# Altium PCB IR2104S.PcbDoc
Units mil, origin at the board's own origin, x right, y up, seen from the top; angles counter-clockwise.
Board outline 1968.5 x 1968.5 mil, 4 copper layers (Top Layer, Layer 1, Layer 2, Bottom Layer), stack 23.756 mil thick; 40 components, 27 nets, 118 pads, 106 vias.
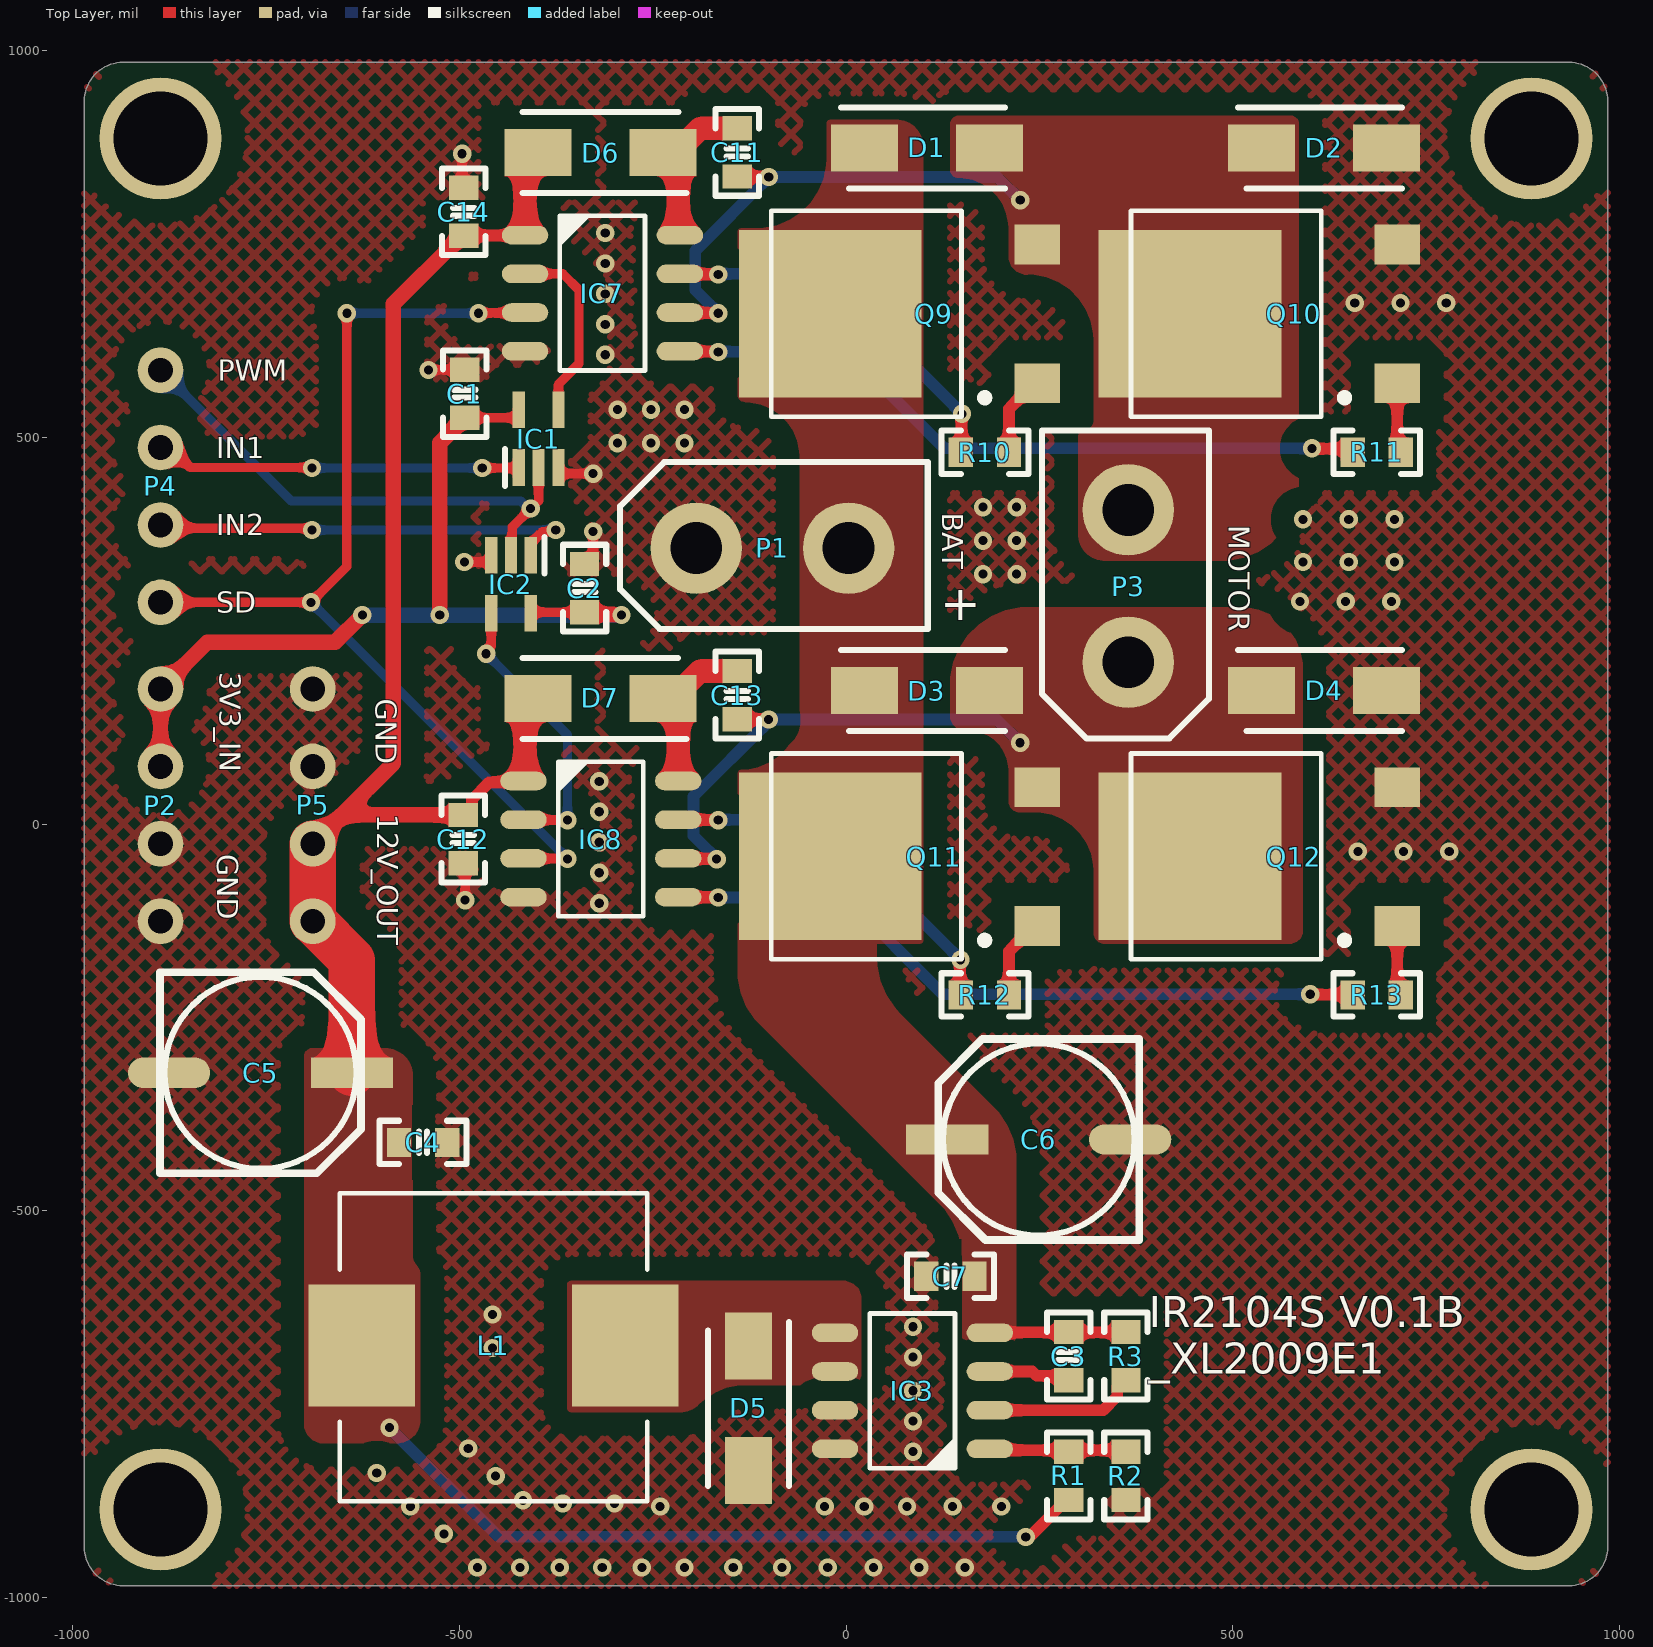
[diagram p0: Top Layer view]
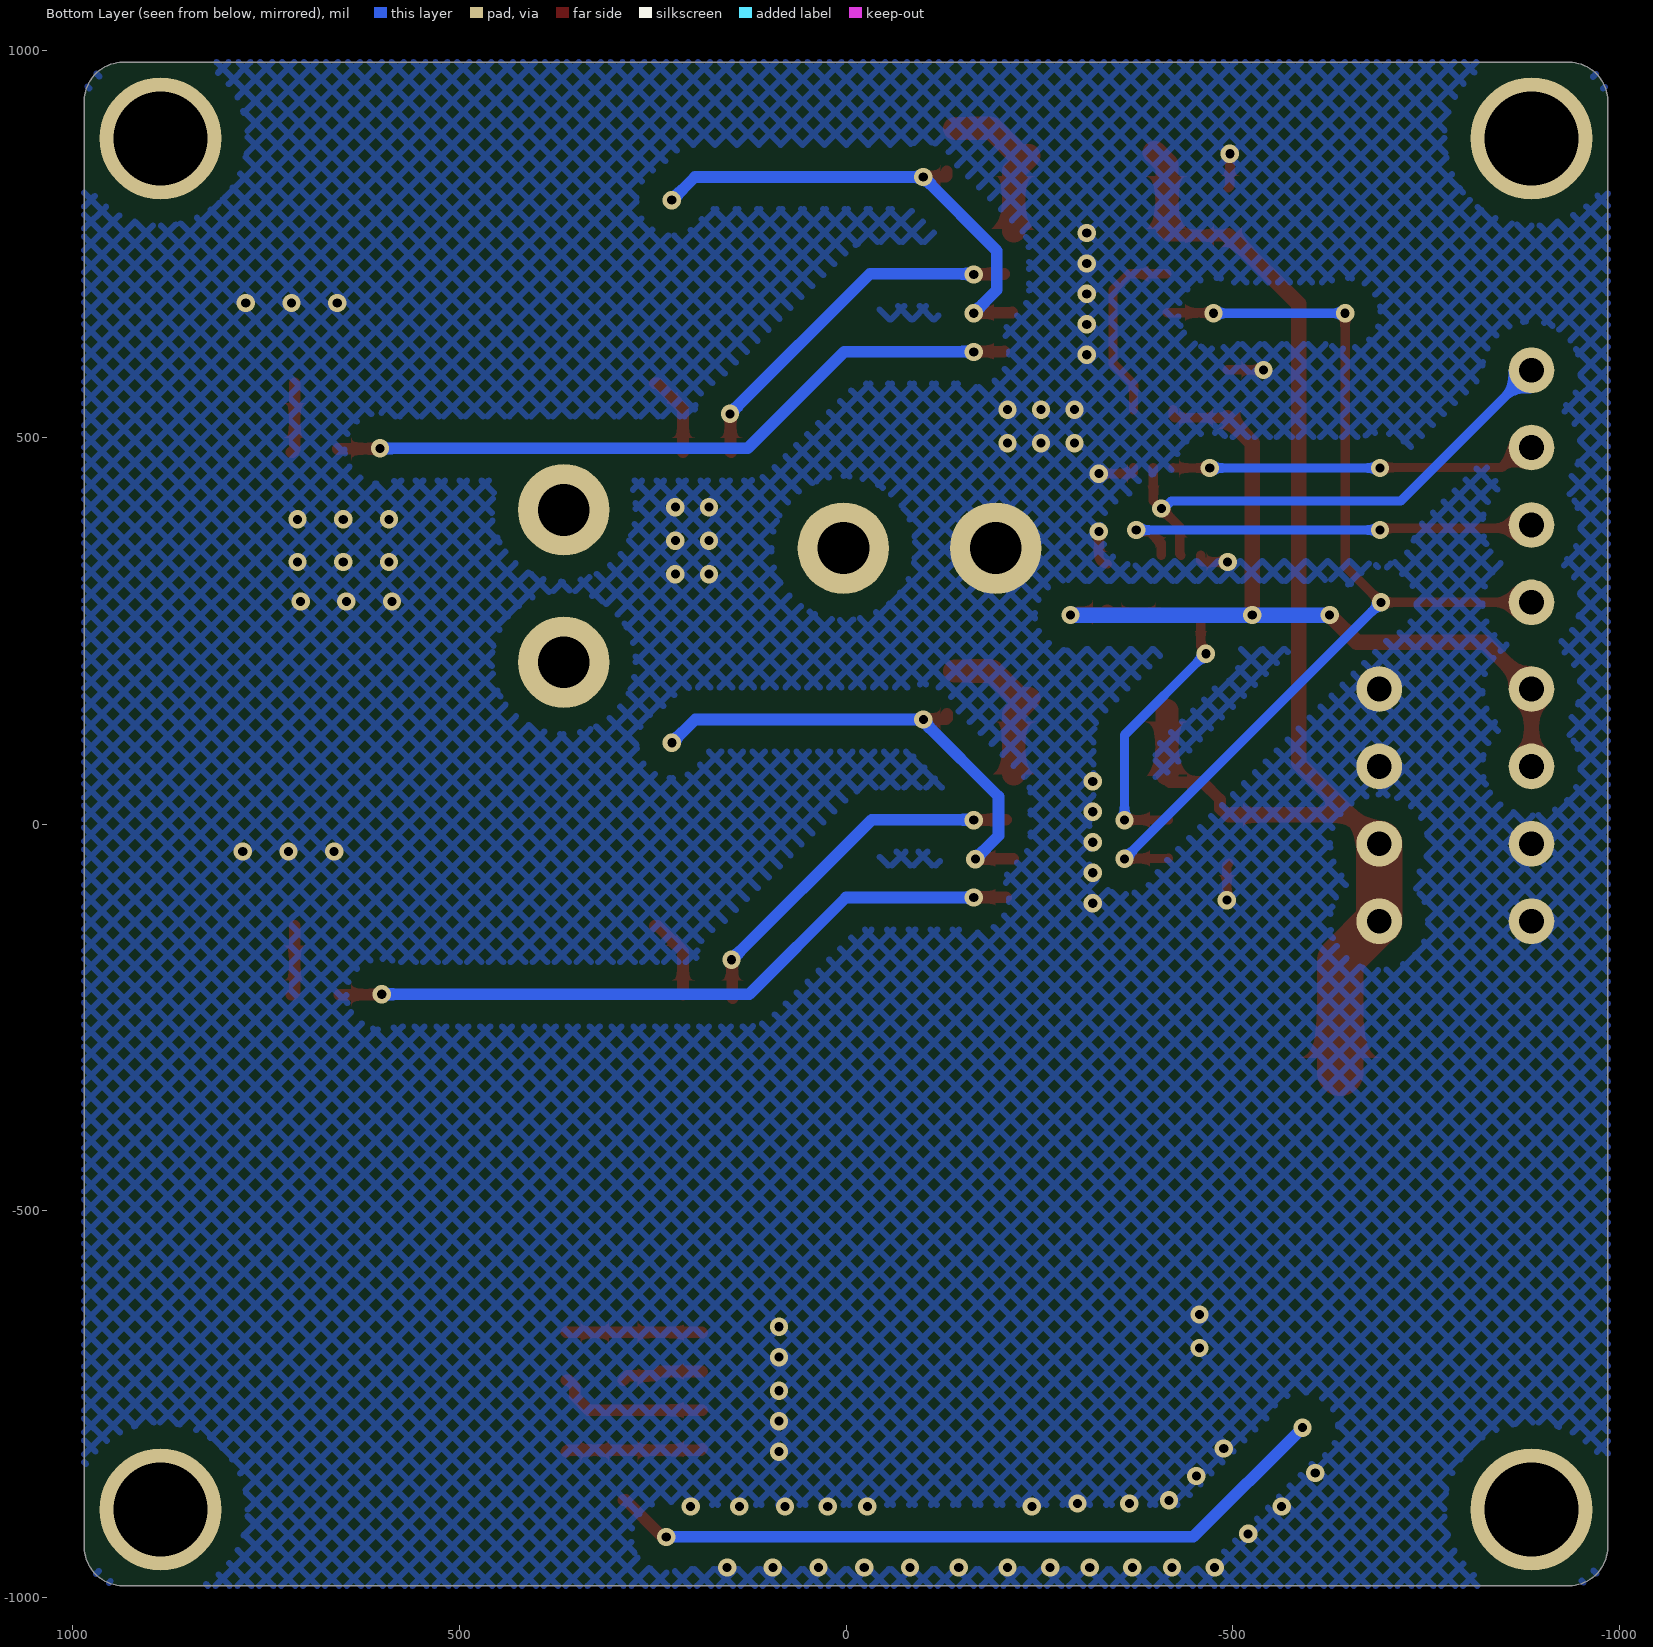
[diagram p1: Bottom Layer view, seen from below]
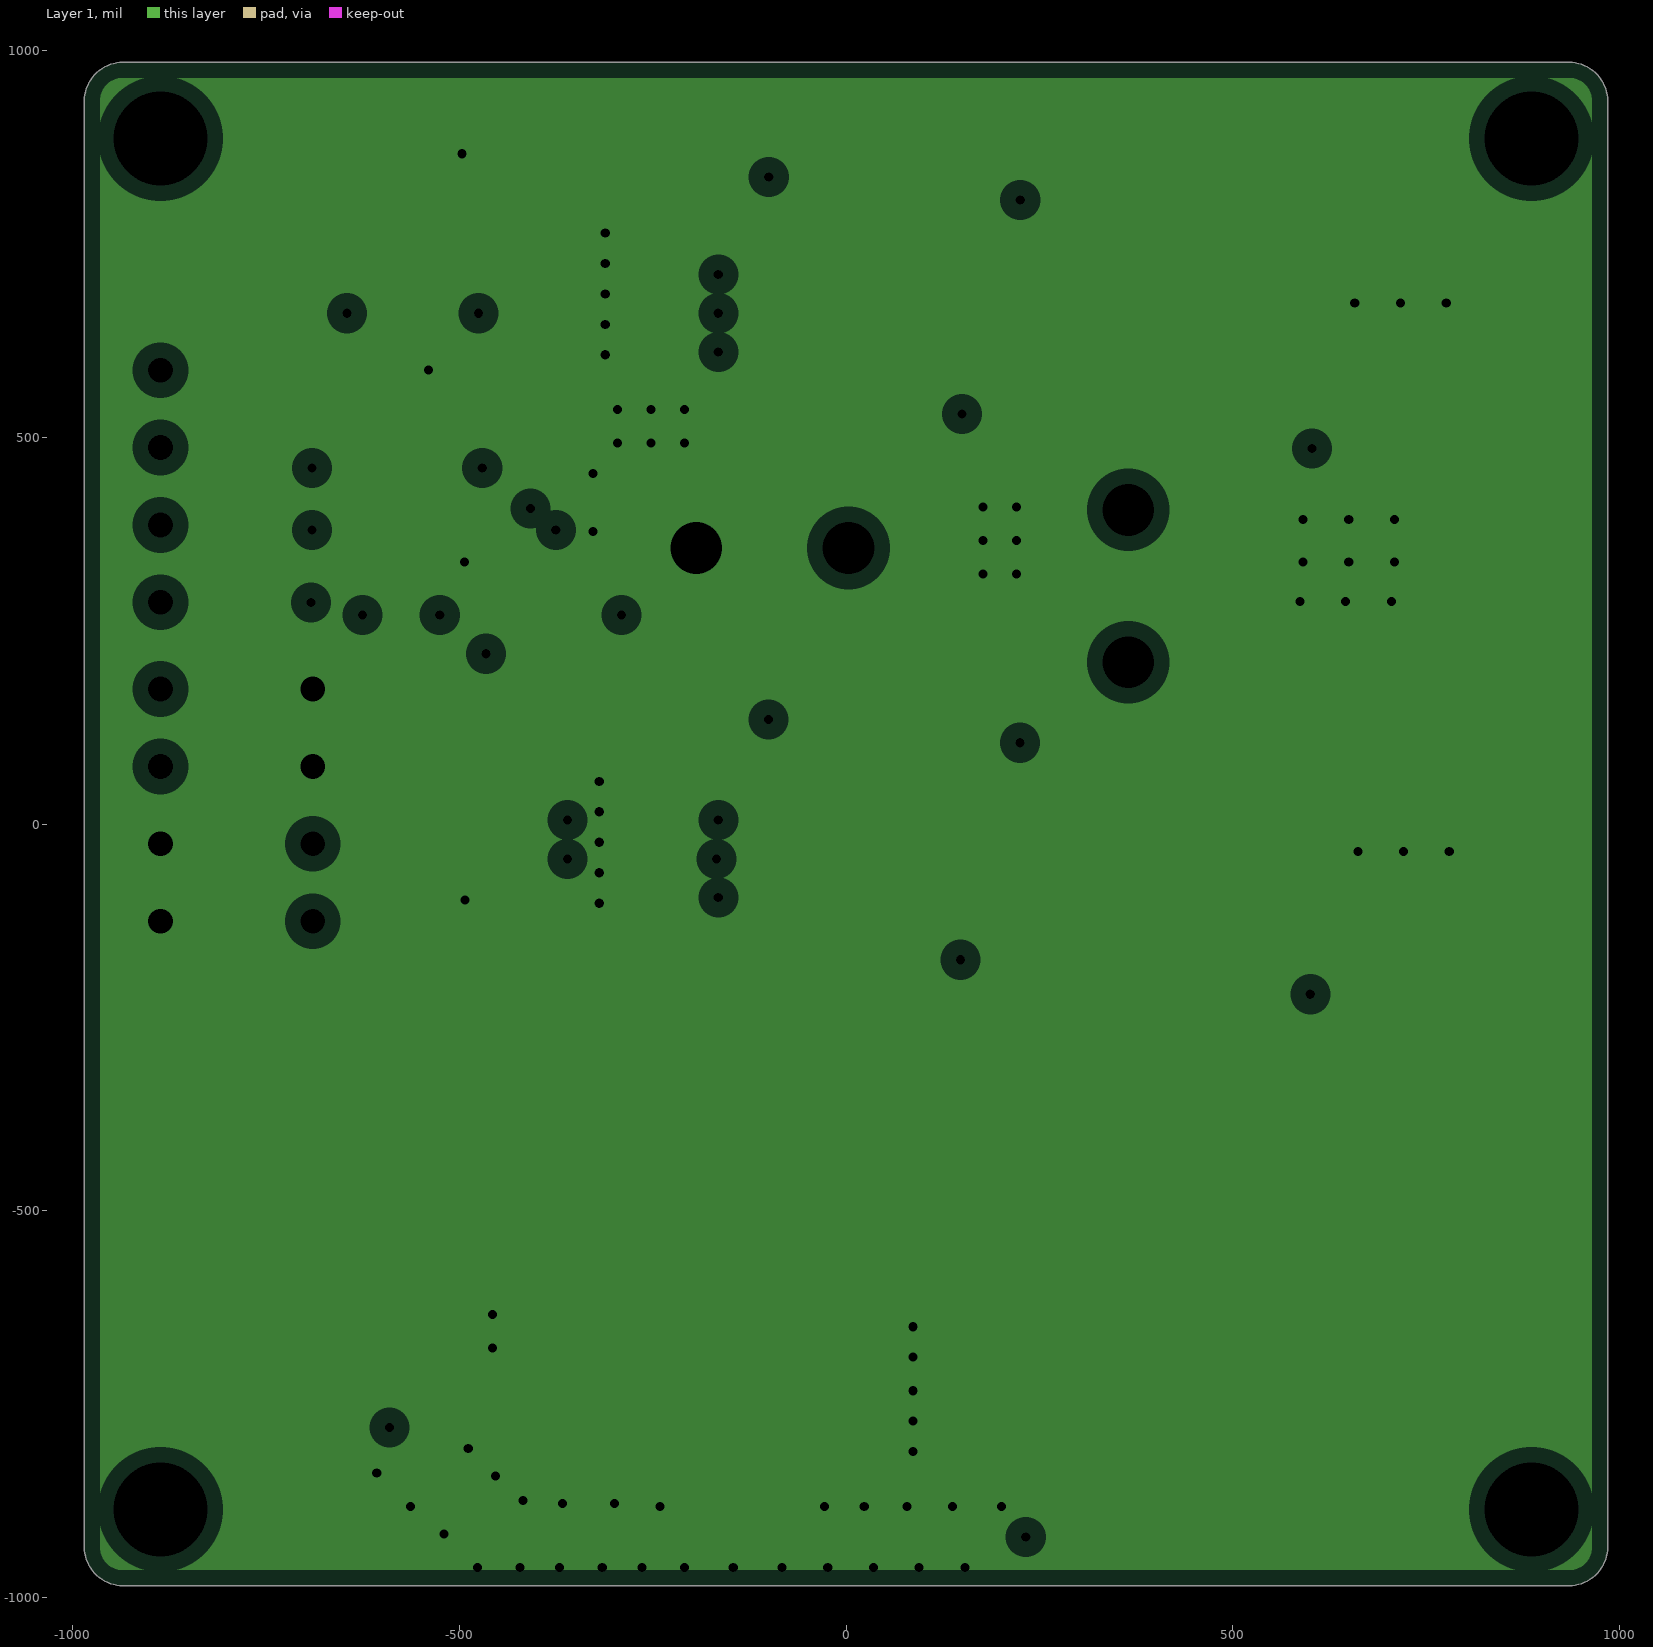
[diagram p2: Layer 1, clearances drawn from the general rule]
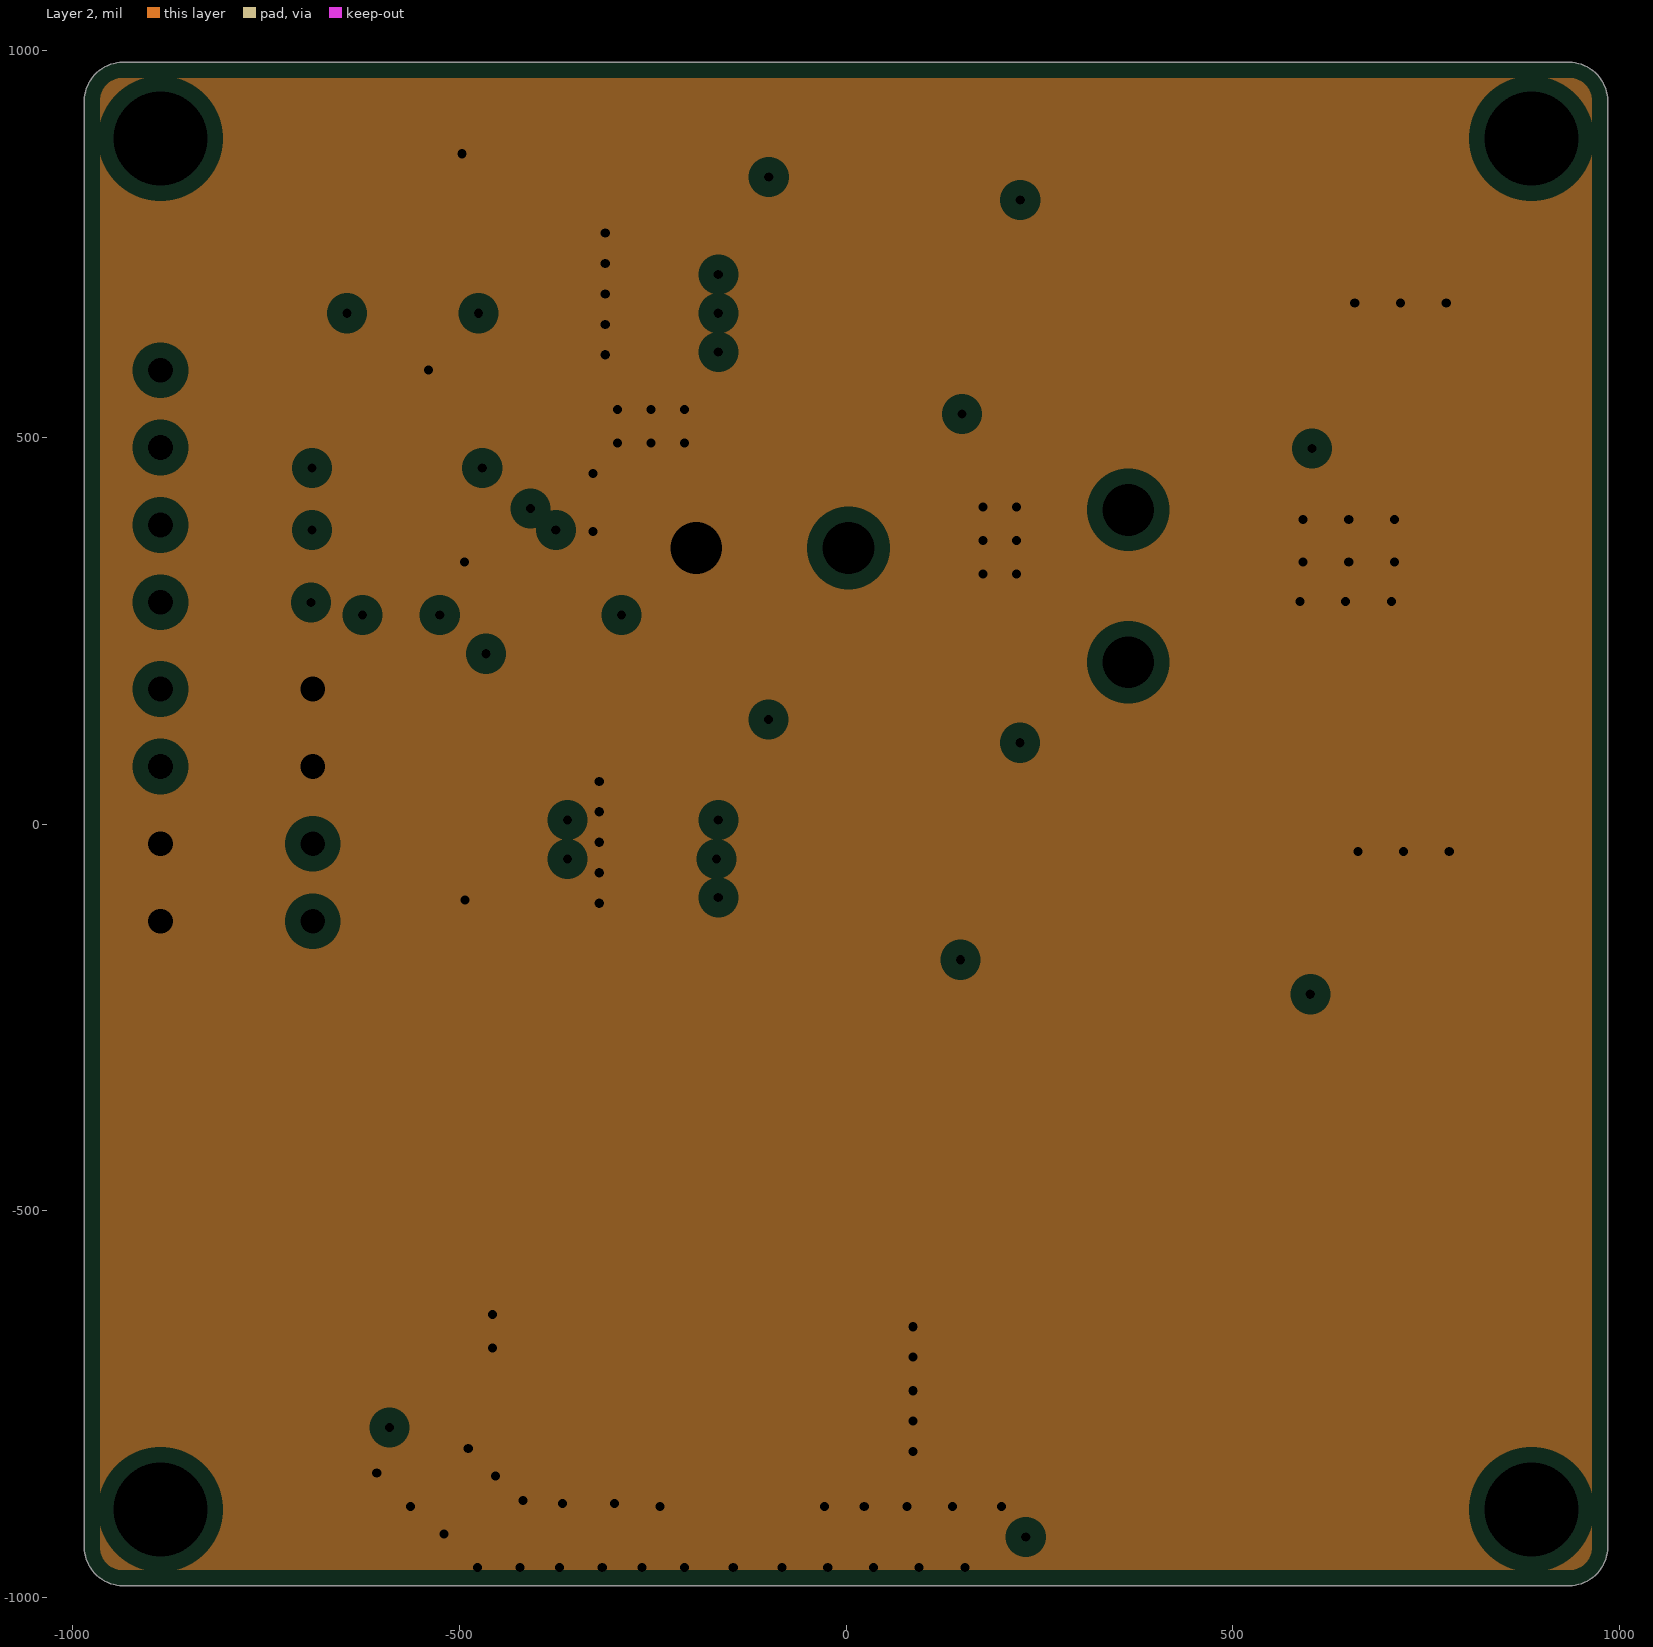
[diagram p3: Layer 2, clearances drawn from the general rule]
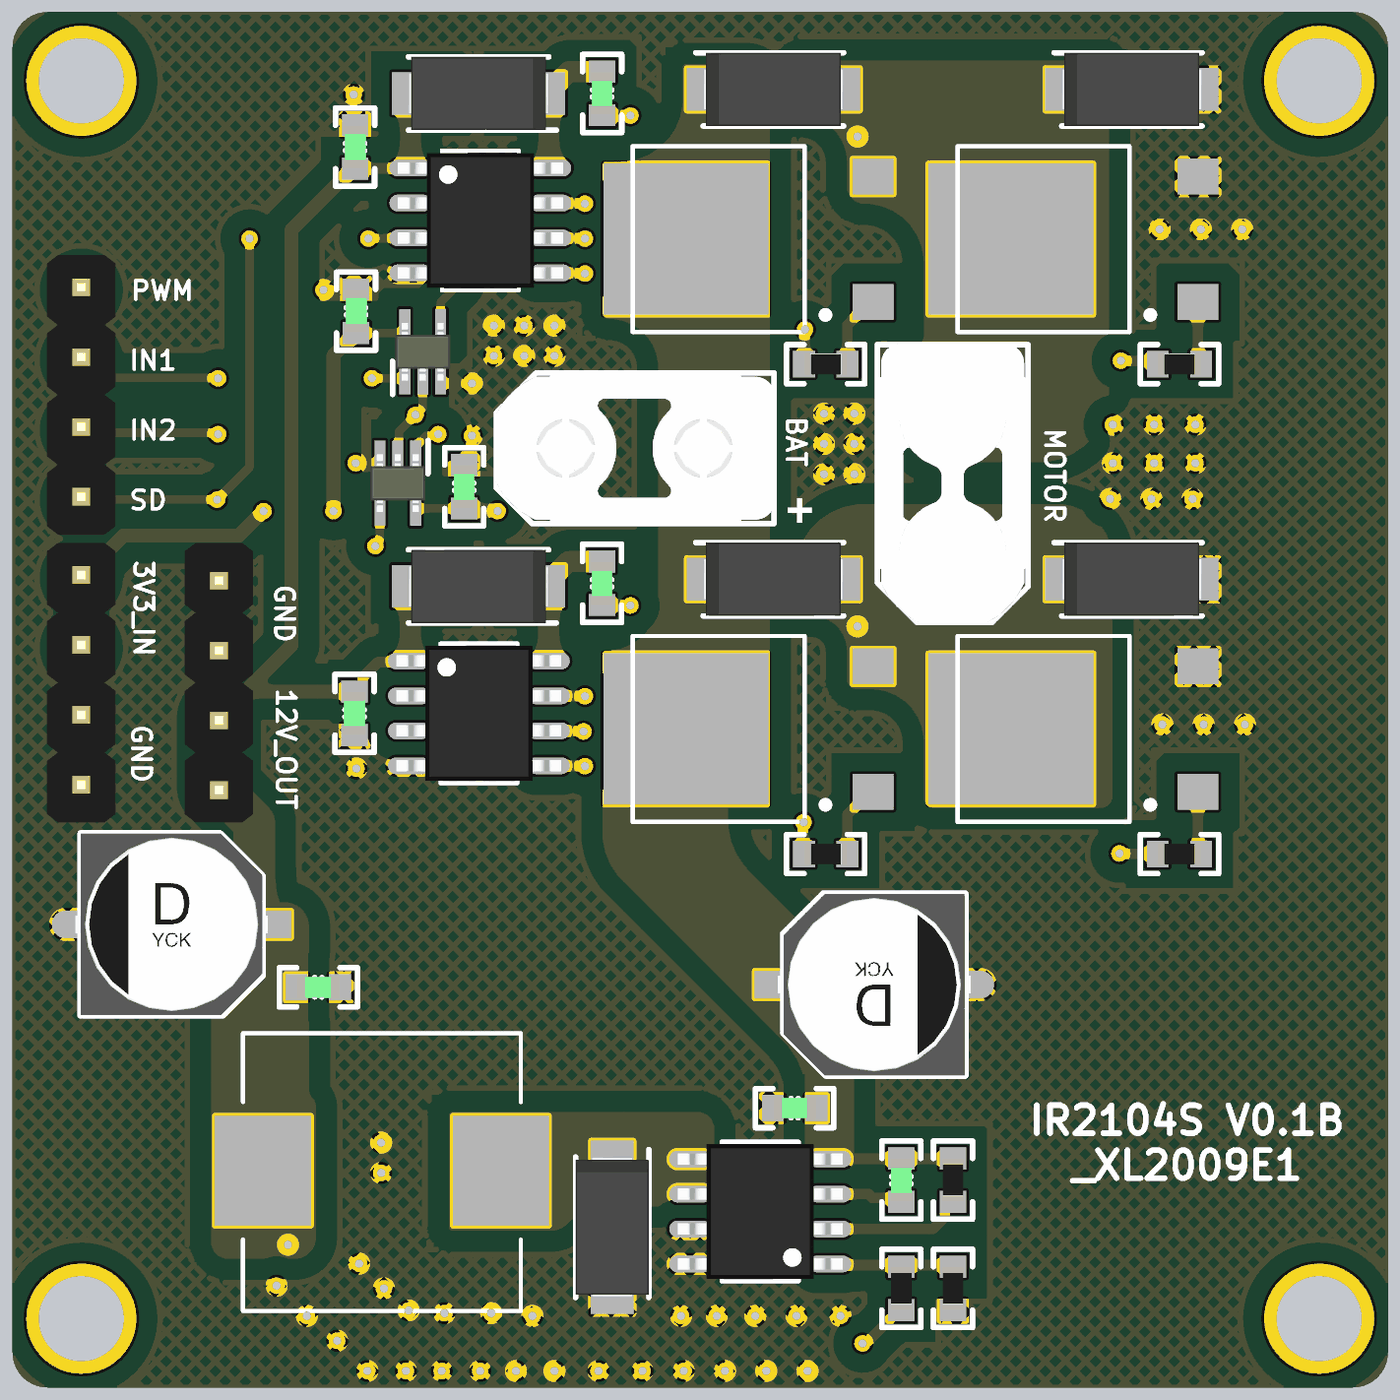
[diagram p4: 3D render of the assembled board from above, using the file's embedded part models]

## Layer stack, top to bottom
Top Solder: solder mask 0.4, Solder Resist, Dk 3.5
Top Layer: signal copper 1.4
Dielectric 2: prepreg 2.8, PP-006, Dk 4.1
Layer 1: plane copper 1.378, net GND
Dielectric 1: dielectric 12.6, FR-4, Dk 4.8
Layer 2: plane copper 1.378, net GND
Dielectric 3: prepreg 2.8, PP-006, Dk 4.1
Bottom Layer: signal copper 1.4
Bottom Solder: solder mask 0.4, Solder Resist, Dk 3.5

## Board outline
-984.25,-934.25 -984.25,934.25 cw(c-934.25,934.25) -934.25,984.25 934.25,984.25 cw(c934.25,934.25) 984.25,934.25 984.25,-934.25 cw(c934.25,-934.25) 934.25,-984.25 -934.25,-984.25 cw(c-934.25,-934.25)

## Design rules (kind name [scope] priority, off if disabled: settings)
Clearance [All] p1: gap=10 ignorepadtopadclearanceinfootprint=FALSE except(0: Arc-Hole Track-Hole SMDPad-Hole THPad-Hole Via-Hole Fill-Hole Poly-Hole Region-Hole Text-Hole; 30: Arc-Fill Arc-Poly Arc-Region Track-Fill Track-Poly Track-Region SMDPad-Fill SMDPad-Poly SMDPad-Region THPad-Fill THPad-Poly THPad-Region Via-Fill Via-Poly Via-Region Fill-Fill Fill-Poly Fill-Region Poly-Poly Poly-Region Region-Region)
PlaneClearance [All] p1: clearance=20
PlaneConnect [All] p1: planeconnectstyle=Direct reliefexpansion=20 reliefentries=4 reliefconductorwidth=10 reliefairgap=10
PolygonConnect [All] p1: connectstyle=Direct reliefconductorwidth=10 reliefentries=4 polygonreliefangle="90 Angle" airgapwidth=10
RoutingVias [All] p1: holewidth=11.81 width=23.62 viastyle="Through Hole" minholewidth=11.81 minwidth=23.62 maxholewidth=11.81 maxwidth=23.62
SolderMaskExpansion [All] p1: expansion=4 istentingtop=FALSE
Width [All] p1: maxlimit=1000 minlimit=10 preferedwidth=20
28 further rules are at their usual default settings.

## Components (designator, comment, footprint, x,y, rotation, side; value= is the part's Value field where it differs from the comment)
C1 "100nF" CAP-0603 -492.62,556.06 r270 top
C2 "100nF" CAP-0603 -337.84,304.85 r270 top
C3 "1uF/50V" CAP-0603 287.8,-687.5 r270 top
C4 "1uF/50V" CAP-0603 -546.59,-411.5 r180 top
C5 "220uF/16V" "CM D(6.3*5.4)" -756.59,-321.5 r0 top
C6 "47uF/50V" "CM D(6.3*5.4)" 249.11,-407.68 r180 top
C7 "1uF/50V" CAP-0603 135,-584.55 r0 top
C11 "1uF/50V" CAP-0603 -140.42,867.79 r270 top
C12 "100nF" CAP-0603 -494.75,-19.43 r90 top
C13 "1uF/50V" CAP-0603 -140.56,166.67 r270 top
C14 "100nF" CAP-0603 -493.99,791.1 r270 top
D1 "SS34" DO-214AC/SMA 104.66,873.6 r0 top
D2 "SS14" DO-214AC/SMA 617.8,873.6 r0 top
D3 "SS34" DO-214AC/SMA 104.66,172.48 r0 top
D4 "SS34" DO-214AC/SMA 617.8,172.48 r0 top
D5 "SS34" DO-214AC/SMA -125.93,-755 r270 top
D6 "SS34" DO-214AC/SMA -317.2,867.7 r180 top
D7 "SS34" DO-214AC/SMA -317.35,162.33 r180 top
IC1 "SN74LVC1G08DCKR" SC-70-5 -397.2,498.08 r90 top
IC2 "SN74LVC1G08DCKR" SC-70-5 -432.93,309.93 r270 top
IC3 "XL2009E1" SOIC_8 85.81,-732.5 r90 top
IC7 "IR2104S" SOIC_8 -314.66,685.95 r270 top
IC8 "IR2104S" SOIC_8 -316.79,-19.43 r270 top
L1 "47uH/3A" L-10040 -455.65,-674.11 r180 top
P1 "XT30" XT30UPB-M -193.53,356.51 r0 top
P2 "HDR1x4_2.54" HDR1x4_2.54_180 -885.83,174.43 r0 top
P3 "XT30" XT30UPB-F 364.68,209.09 r90 top
P4 "HDR1x4_2.54" HDR1x4_2.54_180 -885.83,586.44 r0 top
P5 "HDR1x4_2.54" HDR1x4_2.54_180 -688.98,-125.57 r180 top
Q9 "AP30H80K" TO-252 247.3,569.3 r180 top
Q10 "AP30H80K" TO-252 712.28,569.3 r180 top
Q11 "AP30H80K" TO-252 247.3,-131.82 r180 top
Q12 "AP30H80K" TO-252 712.28,-131.82 r180 top
R1 "44.2k" R-0603 287.8,-842.5 r270 top
R2 "4.7k" R-0603 361.68,-842.5 r90 top
R3 "15k" R-0603 361.68,-687.5 r270 top
R10 "51R" R-0603 179.57,480.31 r0 top
R11 "51R" R-0603 685.87,480.31 r0 top
R12 "51R" R-0603 179.57,-220.82 r0 top
R13 "51R" R-0603 685.87,-220.82 r0 top

## Footprints (in the part's own frame and the unit in brackets; to place one, negate y for a bottom-side part, rotate by r counter-clockwise, add the part's x,y. Pads: shape width x height; smd on the part's side, far side on the other; paste and mask are expansions set on the pad)
CAP-0603 [mm]
  rect 0.8x0.96 smd: 1(-0.79,0) 2(0.79,0)
  silkscreen extent -1.42,-0.71 1.42,0.71, body extent -0.76,-0.39 0.76,0.39, height 0.9
"CM D(6.3*5.4)" [mm] "贴片电解电容，直径6.3mm，高5.4mm"
  rect 2.7x1 smd: 1(3,0)
  oval 2.7x1 smd: 2(-3,0)
  silkscreen extent -3.3,-3.3 3.3,3.3, body extent -3.5,-3.3 3.5,3.3, height 5.4
DO-214AC/SMA [mm]
  rect 2.2x1.55 smd: 1(2.05,0) 2(-2.05,0)
  silkscreen extent -2.83,-1.33 2.55,1.33, body extent -2.55,-1.33 2.55,1.33, height 2.29
HDR1x4_2.54_180 [mm]
  round 1.5 hole 0.813: 1(0,0) 2(0,-2.54) 3(0,-5.08) 4(0,-7.62)
  body extent -1.25,-8.89 1.25,1.27, height 8.2
L-10040 [mm] "10.1*11.6*4.0MM(长*宽*高)"
  rect 3.5x4 smd: 1(-4.326,0) 2(4.326,0)
  silkscreen extent -5.05,-5 5.05,5.1, body extent -5,-5 5,5.08, height 4
R-0603 [mm]
  rect 0.8x0.96 smd: 1(-0.79,0) 2(0.79,0)
  silkscreen extent -1.42,-0.71 1.42,0.71, body extent -0.76,-0.38 0.76,0.38, height 0.41
SC-70-5 [mm]
  rect 1.2x0.4 smd: 1(-0.95,0.65) 2(-0.95,0) 3(-0.95,-0.65) 4(0.95,-0.65) 5(0.95,0.65)
  silkscreen extent -1.55,1.1 -0.35,1.1, body extent -1.05,-1 1.05,1, height 1.1
SOIC_8 [mil]
  oval 24x60 smd: 1(-75,-100.02) 2(-25,-100.02) 3(25,-100.02) 4(75,-100.02) 5(75,99.98) 6(25,99.98) 7(-25,99.98) 8(-75,99.98)
  silkscreen extent -100,-55 100,55, body extent -96,-118 96,118, height 69
TO-252 [mm] "贴片MOS管"
  rect 1.5x1.3 smd: 1(0,0) 2(0,-4.56)
  rect 6x5.5 smd: 3(6.8,-2.29)
  silkscreen extent 1.61,-5.66 8.74,1.09, body extent -0.56,-5.65 9.54,1.08, height 2.37
XT30UPB-F [mm]
  round 3 hole 1.7: 1(5,0) 2(0,0)
  silkscreen extent -2.5,-2.65 7.6,2.83, body extent -2.58,-2.71 7.62,2.89, height 9.4
XT30UPB-M [mm]
  round 3 hole 1.7: 1(5,0) 2(0,0)
  silkscreen extent -2.5,-2.65 7.6,2.83, body extent -2.58,-2.71 7.62,2.89, height 10.68

## Part data
C1 C2 C3 C4 C7 C11 C12 C13 C14: library part CAP, "贴片电容", Package=0402, SuppliersPartNumber=C52923, ComponentLink1Description=供应商链接, ComponentLink1URL=http://www.szlcsc.com/product/details_53938.html, Supplier=LC
C5: library part CAP-POL, "RVT1C221M0607", Package=3528, SuppliersPartNumber=C16133, ComponentLink1Description=供应商链接, ComponentLink1URL=http://www.szlcsc.com/product/details_16815.html, Supplier=LC
C6: library part CAP-POL, "VEJ470M1HTR-0607", Package=3528, SuppliersPartNumber=C16133, ComponentLink1Description=供应商链接, ComponentLink1URL=http://www.szlcsc.com/product/details_16815.html, Supplier=LC
D1 D2 D3 D4 D5 D6 D7: library part DIODE, "二极管", Package=SMA(DO-214AC), SuppliersPartNumber=C22452, ComponentLink1Description=供应商链接, ComponentLink1URL=http://www.szlcsc.com/product/details_23178.html, Supplier=LC
IC1 IC2: "与门", Manufacturer_Name="Texas Instruments", Mouser Part Number=595-SN74LVC1G08DCKR, Arrow Part Number=SN74LVC1G08DCKR, Arrow Price/Stock=https://www.arrow.com/en/products/sn74lvc1g08dckr/texas-instruments?region=nac, Datasheet Link=http://www.ti.com/lit/gpn/sn74lvc1g08, Height=1.1mm, Manufacturer_Part_Number=SN74LVC1G08DCKR, Mouser Price/Stock=https://www.mouser.co.uk/ProductDetail/Texas-Instruments/SN74LVC1G08DCKR?qs=sbcp%2F4gpy0%2F8FFQ%252BRQ5MTw%3D%3D
IC3: "DC-DC电源芯片", Manufacturer_Name=Microchip, Manufacturer_Part_Number=ATTINY85-20PU, Mouser Part Number=556-ATTINY85-20PU, RS Part Number=1331672P, Datasheet Link=https://componentsearchengine.com/Datasheets/2/ATTINY85-20PU.pdf, Height=5.334mm, Mouser Price/Stock=https://www.mouser.com/Search/Refine.aspx?Keyword=556-ATTINY85-20PU, RS Price/Stock=http://uk.rs-online.com/web/p/products/1331672P
IC7 IC8: "Integrated Circuit", Manufacturer_Name=Infineon, Datasheet Link=http://www.infineon.com/dgdl/ir2104.pdf?fileId=5546d462533600a4015355c7c1c31671, Height=1.75mm, Manufacturer_Part_Number=IR2104S
L1: library part INDUCTOR, "SMMS1040", Package=0402, SuppliersPartNumber=C32041, ComponentLink1Description=供应商链接, ComponentLink1URL=http://www.szlcsc.com/product/details_33003.html, Supplier=LC
P1 P3: library part XT30/60, "XT30/60"
P2 P4 P5: "Header"
Q9 Q10 Q11 Q12: library part N-MOS, "N 沟道 MOS", Manufacturer_Name=Nexperia, Manufacturer_Part_Number=SI2302DS, Mouser Part Number=N/A, RS Part Number=7983053P, Datasheet Link=https://assets.nexperia.com/documents/data-sheet/SI2302DS.pdf, Height=1.1mm, Mouser Price/Stock=https://www.mouser.com/Search/Refine.aspx?Keyword=N%2FA, RS Price/Stock=http://uk.rs-online.com/web/p/products/7983053P
R1 R2 R3 R10 R11 R12 R13: library part RES, "贴片电阻", Package=0805, SuppliersPartNumber=C17798, Supplier=LC

## Free pads (board coordinates)
  round 157.48 hole 122.05: 3(-885.83,-885.83) 3(-885.83,885.83) 3(885.83,-885.83) 3(885.83,885.83)

## Via types
v1: diameter 23.62, hole 11.81, Top Layer to Bottom Layer, 106 vias

## Nets (pads, with @x,y where several pads share a name; then routed paths per layer and width w, separated by ;. In a path a pad name is that pad's centre, name@x,y a point inside that pad or via, vN(x,y) a via of type N, cw(c..) or ccw(c..) an arc to the next point about the centre after c; other vN are vias at no path point)
GND: C1.1 C2.1 C4.1 C5.2 C6.2 C7.1 C12.1 C14.1 D2.1 D4.1 D5.1 IC1.3 IC2.3 IC3.7 IC3.8 IC7.4 IC8.4 P1.2 P2.3 P2.4 P5.3 P5.4 Q10.2 Q12.2 R2.1 | length 283.1
  Top Layer w12: v1(-539.37,586.61) -539.1,586.89 -492.9,586.89 C1.1 ; v1(-496.06,866.14) -496.06,824.27 C14.1 ; C12.1 -492.13,-53.16 v1(-492.13,-98.43) ; v1(-493.19,338.58) -460.4,338.58 -458.52,340.46 IC2.3 ; IC1.3 -371.61,454.63 -369.74,452.76 v1(-326.77,452.76) ; C2.1 ccw(c-337.84,347.01) -326.77,347.01 v1(-326.77,377.95)
  other v1: -476.38,-960.63 -421.26,-960.63 -370.08,-960.63 -314.96,-960.63 -263.78,-960.63 -208.66,-960.63 -145.67,-960.63 -82.68,-960.63 -23.62,-960.63 35.43,-960.63 94.49,-960.63 153.54,-960.63 -519.68,-917.32 -562.99,-881.89 -240.16,-881.89 -27.56,-881.89 23.62,-881.89 78.74,-881.89 137.8,-881.89 200.79,-881.89 -366.14,-877.95 -299.21,-877.95 -417.32,-874.02 -452.76,-842.52 -606.3,-838.58 86.61,-811.02 -488.19,-807.09 86.61,-771.65 86.61,-732.28 86.61,-688.98 -456.69,-677.17 86.61,-649.61 -456.69,-633.86 -318.9,-102.36 -318.9,-62.99 661.42,-35.43 720.47,-35.43 779.53,-35.43 -318.9,-23.62 -318.9,15.75 -318.9,55.12 586.61,287.4 645.67,287.4 704.72,287.4 177.17,322.83 220.47,322.83 590.55,338.58 649.61,338.58 708.66,338.58 177.17,366.14 220.47,366.14 590.55,393.7 649.61,393.7 708.66,393.7 177.17,409.45 220.47,409.45 -295.28,492.13 -251.97,492.13 -208.66,492.13 -295.28,535.43 -251.97,535.43 -208.66,535.43 -311.02,606.3 -311.02,645.67 657.48,673.23 716.54,673.23 775.59,673.23 -311.02,685.04 -311.02,724.41 -311.02,763.78
IN1: IC1.1 P4.2 | length 474
  Top Layer w12: P4.2 -873.09,486.44 -847.34,460.68 v1@-690,460.68 ; v1(-470,460) -423.48,460 IC1.1
  Bottom Layer w12: v1(-690,460) v1(-470,460)
IN2: IC2.1 P4.3 | length 574.6
  Top Layer w12: P4.3 -881.61,382.22 -692.22,382.22 v1(-690,380) ; IC2.1 -407.34,363.08 -392.65,377.78 -377.22,377.78 v1(-375,380)
  Bottom Layer w12: P4.3 P4.3@-881.61,382.22 ; v1(-690,380) v1(-375,380)
M+: C11.2 D1.1 D2.2 IC7.6 P3.1 Q9.2 Q10.3 | length 652.4
  Top Layer w15: IC7.6 -214.2,660.47 -165.47,660.47 v1(-165,660) ; C11.2@-130.42,843.54 -130.42,837.8 -129.02,836.41 -100.14,836.41 v1(-99.85,836.12)
  Bottom Layer w15: v1(-165,660) -195,690 -195,740.98 v1(-99.85,836.12) 195.15,836.12 v1(225.15,806.12)
M-: C13.2
M-: D3.1 D4.2 IC8.6 P3.2 Q11.2 Q12.3 | length 651.1
  Top Layer w15: IC8.6@-216.33,-44.91 v1@-167.6,-44.91 ; -130.56,142.42 -130.56,136.68 -129.16,135.28 -100.28,135.28 v1(-100,135)
  Bottom Layer w15: v1(-167.13,-45.38) -197.13,-15.38 -197.13,35.6 v1@-101.98,130.74 ; v1(-100,135) 195,135 v1(225,105)
NetC3_2: C3.2 IC3.3 | length 106.6
  Top Layer w15: IC3.3 240.76,-707.5 246.4,-713.14 282.33,-713.14 C3.2
NetC11_1: C11.1 D6.2 IC7.8 | length 216.3
  Top Layer w30: IC7.8@-216.66,766.12 -216.66,843.61 -236.5,863.45 -223.7,863.45 -188.25,898.89 C11.1
NetC13_1: C13.1 D7.2 IC8.8 | length 216.3
  Top Layer w30: IC8.8@-216.8,65 -216.8,142.49 D7.2 -223.85,162.33 -188.4,197.77 C13.1
NetD5_2: D5.2 IC3.5 IC3.6 L1.1
NetIC3_1: IC3.1 R1.1 R2.2 | length 177.5
  Top Layer w15: IC3.1 187.55,-809.22 359.5,-809.22 R2.2
NetIC3_2: IC3.2 R3.2 | length 199.5
  Top Layer w15: IC3.2 332.5,-757.5 350.28,-739.72 350.28,-726.85 358.53,-718.6 R3.2
NetIC7_5: IC7.5 R11.1 | length 914.2
  Top Layer w15: IC7.5@-204.67,610.95 -204.2,610.47 -165.47,610.47 v1(-165,610) ; v1(602.13,485.38) 602.54,484.97 656.49,484.97 R11.1@656.9,484.56
  Bottom Layer w15: v1(-165,610) -164.62,610.38 2.13,610.38 127.13,485.38 v1(602.13,485.38)
NetIC7_7: IC7.7 R10.1 | length 481.8
  Top Layer w15: IC7.7@-204.67,710.95 -204.2,710.47 -165.47,710.47 v1(-165,710) ; R10.1 R10.1@149.23,481.07 ; R10.1@150,481.84 R10.1@149.23,481.07 ; v1(150,530) 149.23,529.23 R10.1@149.23,481.07
  Bottom Layer w15: v1(-165,710) -164.05,710.95 -30.95,710.95 v1(150,530)
NetIC8_5: IC8.5 R13.1 | length 913.9
  Top Layer w15: IC8.5@-206.8,-94.43 -206.52,-94.72 -165.28,-94.72 v1(-165,-95) ; v1(600,-220) 600.41,-220.41 654.36,-220.41 R13.1
  Bottom Layer w15: v1(-165,-95) 0,-95 125,-220 v1(600,-220)
NetIC8_7: IC8.7 R12.1 | length 481.5
  Top Layer w15: IC8.7@-206.8,5.57 -206.52,5.28 -165.28,5.28 v1(-165,5) ; R12.1@146.34,-225.07 R12.1@147.1,-224.3 ; R12.1@147.87,-223.54 R12.1@147.1,-224.3 ; v1(147.87,-175.38) 147.1,-176.14 R12.1@147.1,-224.3
  Bottom Layer w15: v1(-165,5) -164.43,5.57 -33.08,5.57 v1(147.87,-175.38)
NetQ9_1: Q9.1 R10.2 | length 106.5
  Top Layer w15: R10.2 210.67,536.61 243.37,569.3 Q9.1
NetQ10_1: Q10.1 R11.2 | length 91.7
  Top Layer w15: Q10.1 712.28,485 ccw(c716.98,485) R11.2
NetQ11_1: Q11.1 R12.2 | length 106.5
  Top Layer w15: R12.2 210.67,-164.52 243.37,-131.82 Q11.1
NetQ12_1: Q12.1 R13.2 | length 91.7
  Top Layer w15: Q12.1 712.28,-216.12 ccw(c716.98,-216.12) R13.2
PWM: IC1.2 IC2.2 P4.1 | length 680.8
  Top Layer w12: IC2.2 -431.22,349.05 -431.22,383.78 v1@-407.19,407.81 ; v1(-407.5,407.81) v1@-407.19,407.81 ; IC1.2 -397.2,417.8 v1@-407.19,407.81
  Bottom Layer w12: P4.1 -716.71,417.32 -420.16,417.32 -410.64,407.81 v1(-407.5,407.81)
PWMA: IC1.4 IC7.2 | length 243.9
  Top Layer w12: IC7.2 -365.94,710.95 -345,690 -345,595 -371.59,568.41 IC1.4@-371.59,535.51
PWMB: IC2.4 IC8.2 | length 370.7
  Top Layer w12: v1(-465,220) -465,223.14 -458.52,229.62 IC2.4 ; IC8.2 -416.52,5.28 -360.28,5.28 v1(-360,5)
  Bottom Layer w12: v1(-465,220) -360,115 v1(-360,5)
SD: IC7.3 IC8.3 P4.4 | length 1343.7
  Top Layer w12: P4.4 v1(-691.44,286.44) -645,332.88 v1(-645,660) ; v1(-475,660) -474.53,660.47 -415.15,660.47 IC7.3 ; IC8.3 -416.52,-44.72 -360.28,-44.72 v1(-360,-45)
  Bottom Layer w12: v1(-691.44,286.44) v1(-360,-45) ; v1(-645,660) v1(-475,660)
VCC_3V3: C1.2 C2.2 IC1.5 IC2.5 P2.1 P2.2 | length 1202.4
  Top Layer w12: C1.2 -424.67,524.96 -422.8,526.83 IC1.5 ; IC2.5 -406.13,273.74 C2.2
  Top Layer w20: P2.2 P2.1 -825.26,235 -660,235 v1(-625,270) ; v1(-525,270) -525,492.58 C1.2 ; C2.2 -334.78,270.69 -290.69,270.69 v1(-290,270)
  Bottom Layer w20: v1(-625,270) v1(-525,270) v1(-290,270)
VCC_12V: C4.2 C5.1 C12.2 C14.2 D6.1 D7.1 IC7.1 IC8.1 L1.2 P5.1 P5.2 R1.2 | length 2668.3
  Top Layer w15: C12.2 -491.6,11.67 -483.35,19.92 -483.35,31.65 -461.15,53.85 -418.53,53.85 IC8.1 ; C14.2 -493.52,760.47 -415.15,760.47 IC7.1 ; v1(232.28,-921.26) 233.93,-919.61 238.64,-919.61 284.65,-873.6 R1.2
  Top Layer w20: P5.2 -651.74,11.67 ; C12.2 -651.74,11.67 ; C14.2 -499.74,754.25 -502.89,754.25 -585,672.14 -585,78.41 -651.74,11.67
  Top Layer w30: IC8.1@-414.82,64.62 D7.1@-414.82,146.81 ; IC7.1@-414.67,770 -414.67,852.19 -399.16,867.7 D6.1
  Top Layer w60: P5.2 P5.1 -638.48,-176.06 C5.1
  Bottom Layer w15: v1(-590,-780) -448.74,-921.26 v1(232.28,-921.26)
VM: C3.1 C6.1 C7.2 D1.2 D3.2 IC3.4 P1.1 Q9.3 Q11.3 R3.1 | length 176.3
  Top Layer w15: IC3.4 186.37,-656.95 361.13,-656.95 R3.1

## Polygon pours and split planes (outlines as drawn)
M+ on Top Layer "NONET_L01_P-001" (solid, pour order 0): 235,710 cw(c235,735) 210,735 210,770 ccw(c145,770) 145,835 cw(c145,845) 135,845 135,905 cw(c145,905) 145,915 575,915 cw(c575,905) 585,905 585,440 cw(c485,440) 485,340 335,340 cw(c335,375) 300,375 300,500 cw(c310,500) 310,510 ccw(c310,520) 320,520 320,625 ccw(c235,625)
M- on Top Layer "NONET_L01_P-001" (solid, pour order 1): 320,-60 ccw(c245,-60) 245,15 225,15 cw(c225,30) 210,30 210,70 ccw(c160,70) 160,120 155,120 cw(c155,140) 135,140 135,180 cw(c235,180) 235,280 510,280 cw(c510,200) 590,200 590,-137.98 cw(c573.1,-137.81) 572.93,-154.71 cw(c570,-140.01) 570,-155 335,-155 cw(c335,-140) 320,-140
VM on Top Layer "NONET_L01_P-001" (solid, pour order 2): -140,-145 -140,65 cw(c-135,65) -135,70 ccw(c-135,145) -60,145 -60,475 ccw(c-130,475) -130,545 cw(c-130,555) -140,555 -140,765 cw(c-135,765) -135,770 -115,770 ccw(c-115,860) -25,860 -25,905 cw(c-20,905) -20,910 65,910 cw(c65,875) 100,875 100,-150 cw(c95,-150) 95,-155 -135,-155 cw(c-135,-150) -140,-150
VM on Top Layer "NONET_L01_P-001" (solid, pour order 3): 40,-150 40,-173.58 ccw(c140,-173.58) 69.29,-244.29 190.71,-365.71 cw(c120,-436.42) 220,-436.42 220,-660 cw(c205,-660) 205,-675 165,-675 cw(c165,-660) 150,-660 150,-561.42 ccw(c50,-561.42) 120.71,-490.71 -110.71,-259.29 cw(c-40,-188.58) -140,-188.58 -140,-147.5 33.96,-147.5 cw(c33.96,-156.04)
NetD5_2 on Top Layer "NONET_L01_P-001" (solid, pour order 4): 20,-710 cw(c5,-710) 5,-725 -129.64,-725 ccw(c-129.64,-810.36) -190,-750 cw(c-214.14,-725.86) -214.14,-760 -355,-760 cw(c-355,-755) -360,-755 -360,-595 cw(c-355,-595) -355,-590 -5,-590 cw(c-5,-615) 20,-615
VCC_12V on Top Layer "NONET_L01_P-001" (solid, pour order 5): -550,-770 cw(c-580,-770) -580,-800 -675,-800 cw(c-675,-775) -700,-775 -700,-300 cw(c-690,-300) -690,-290 -595,-290 cw(c-595,-325) -560,-325 -560,-557.93 ccw(c-542.93,-557.93) -555,-570 cw(c-567.07,-582.07) -550,-582.07 -550,-740
GND on Top Layer "NONET_L01_P-001" (hatched 45Degree grid 20 track 8, pour order 8): 984.25,-933.07 cw(c933.07,-933.07) 933.07,-984.25 -933.07,-984.25 cw(c-933.07,-933.07) -984.25,-933.07 -984.25,933.07 cw(c-933.07,933.07) -933.07,984.25 933.07,984.25 cw(c933.07,933.07) 984.25,933.07
GND on Bottom Layer "NONET_L01_P-001" (hatched 45Degree grid 20 track 8, pour order 7): 984.25,-933.07 cw(c933.07,-933.07) 933.07,-984.25 -933.07,-984.25 cw(c-933.07,-933.07) -984.25,-933.07 -984.25,933.07 cw(c-933.07,933.07) -933.07,984.25 933.07,984.25 cw(c933.07,933.07) 984.25,933.07
GND on Layer 2 (split plane): 938.94,963.88 943.52,962.78 947.87,960.98 951.88,958.52 955.46,955.46 958.52,951.88 960.98,947.87 962.78,943.52 963.88,938.94 964.2,934.76 964.16,934.25 964.16,-934.25 964.2,-934.76 963.88,-938.94 962.78,-943.52 960.98,-947.87 958.52,-951.88 955.46,-955.46 951.88,-958.52 947.87,-960.98 943.52,-962.78 938.94,-963.88 934.76,-964.2 934.25,-964.16 -934.25,-964.16 -934.76,-964.2 -938.94,-963.88 -943.52,-962.78 -947.87,-960.98 -951.88,-958.52 -955.46,-955.46 -958.52,-951.88 -960.98,-947.87 -962.78,-943.52 -963.88,-938.94 -964.2,-934.76 -964.16,-934.25 -964.16,934.25 -964.2,934.76 -963.88,938.94 -962.78,943.52 -960.98,947.87 -958.52,951.88 -955.46,955.46 -951.88,958.52 -947.87,960.98 -943.52,962.78 -938.94,963.88 -934.76,964.2 -934.25,964.16 934.25,964.16 934.76,964.2
GND on Layer 1 (split plane): 938.94,963.88 943.52,962.78 947.87,960.98 951.88,958.52 955.46,955.46 958.52,951.88 960.98,947.87 962.78,943.52 963.88,938.94 964.2,934.76 964.16,934.25 964.16,-934.25 964.2,-934.76 963.88,-938.94 962.78,-943.52 960.98,-947.87 958.52,-951.88 955.46,-955.46 951.88,-958.52 947.87,-960.98 943.52,-962.78 938.94,-963.88 934.76,-964.2 934.25,-964.16 -934.25,-964.16 -934.76,-964.2 -938.94,-963.88 -943.52,-962.78 -947.87,-960.98 -951.88,-958.52 -955.46,-955.46 -958.52,-951.88 -960.98,-947.87 -962.78,-943.52 -963.88,-938.94 -964.2,-934.76 -964.16,-934.25 -964.16,934.25 -964.2,934.76 -963.88,938.94 -962.78,943.52 -960.98,947.87 -958.52,951.88 -955.46,955.46 -951.88,958.52 -947.87,960.98 -943.52,962.78 -938.94,963.88 -934.76,964.2 -934.25,964.16 934.25,964.16 934.76,964.2

## Silkscreen, mask and mechanical layers (free items; w line width, h text height)
Top Overlay:
  text "PWM" at -811.58,572.94 h27
  text "IN1" at -813.83,472.94 h27
  text "BAT" at 124.3,402.13 h27 r270
  text "MOTOR" at 494.38,385.81 h27 r270
  text "IN2" at -813.83,372.94 h27
  text "SD" at -813.83,272.94 h27
  text "3V3_IN" at -809.33,196.27 h27 r270
  text "GND" at -607.98,161.97 h27 r270
  text "12V_OUT" at -605.73,12.92 h27 r270
  text "GND" at -812.71,-38.81 h27 r270
  text "IR2104S V0.1B / _XL2009E1" at 390.95,-710.59 h40
Mechanical 1:
  the board outline again, w15

## Text inside footprints (layer, text, board x,y; h text height)
P1: Top Overlay "+" at 122.05,248.03 h78.74